# Altium PCB PCB_emuladorHIL_2025-01-22.pcbdoc
Units mm, origin at the board's own origin, x right, y up, seen from the top; angles counter-clockwise.
Board outline 88.01 x 83.31 mm, 2 copper layers (Top Layer, Bottom Layer); 9 components, 62 nets, 83 pads, 0 vias.
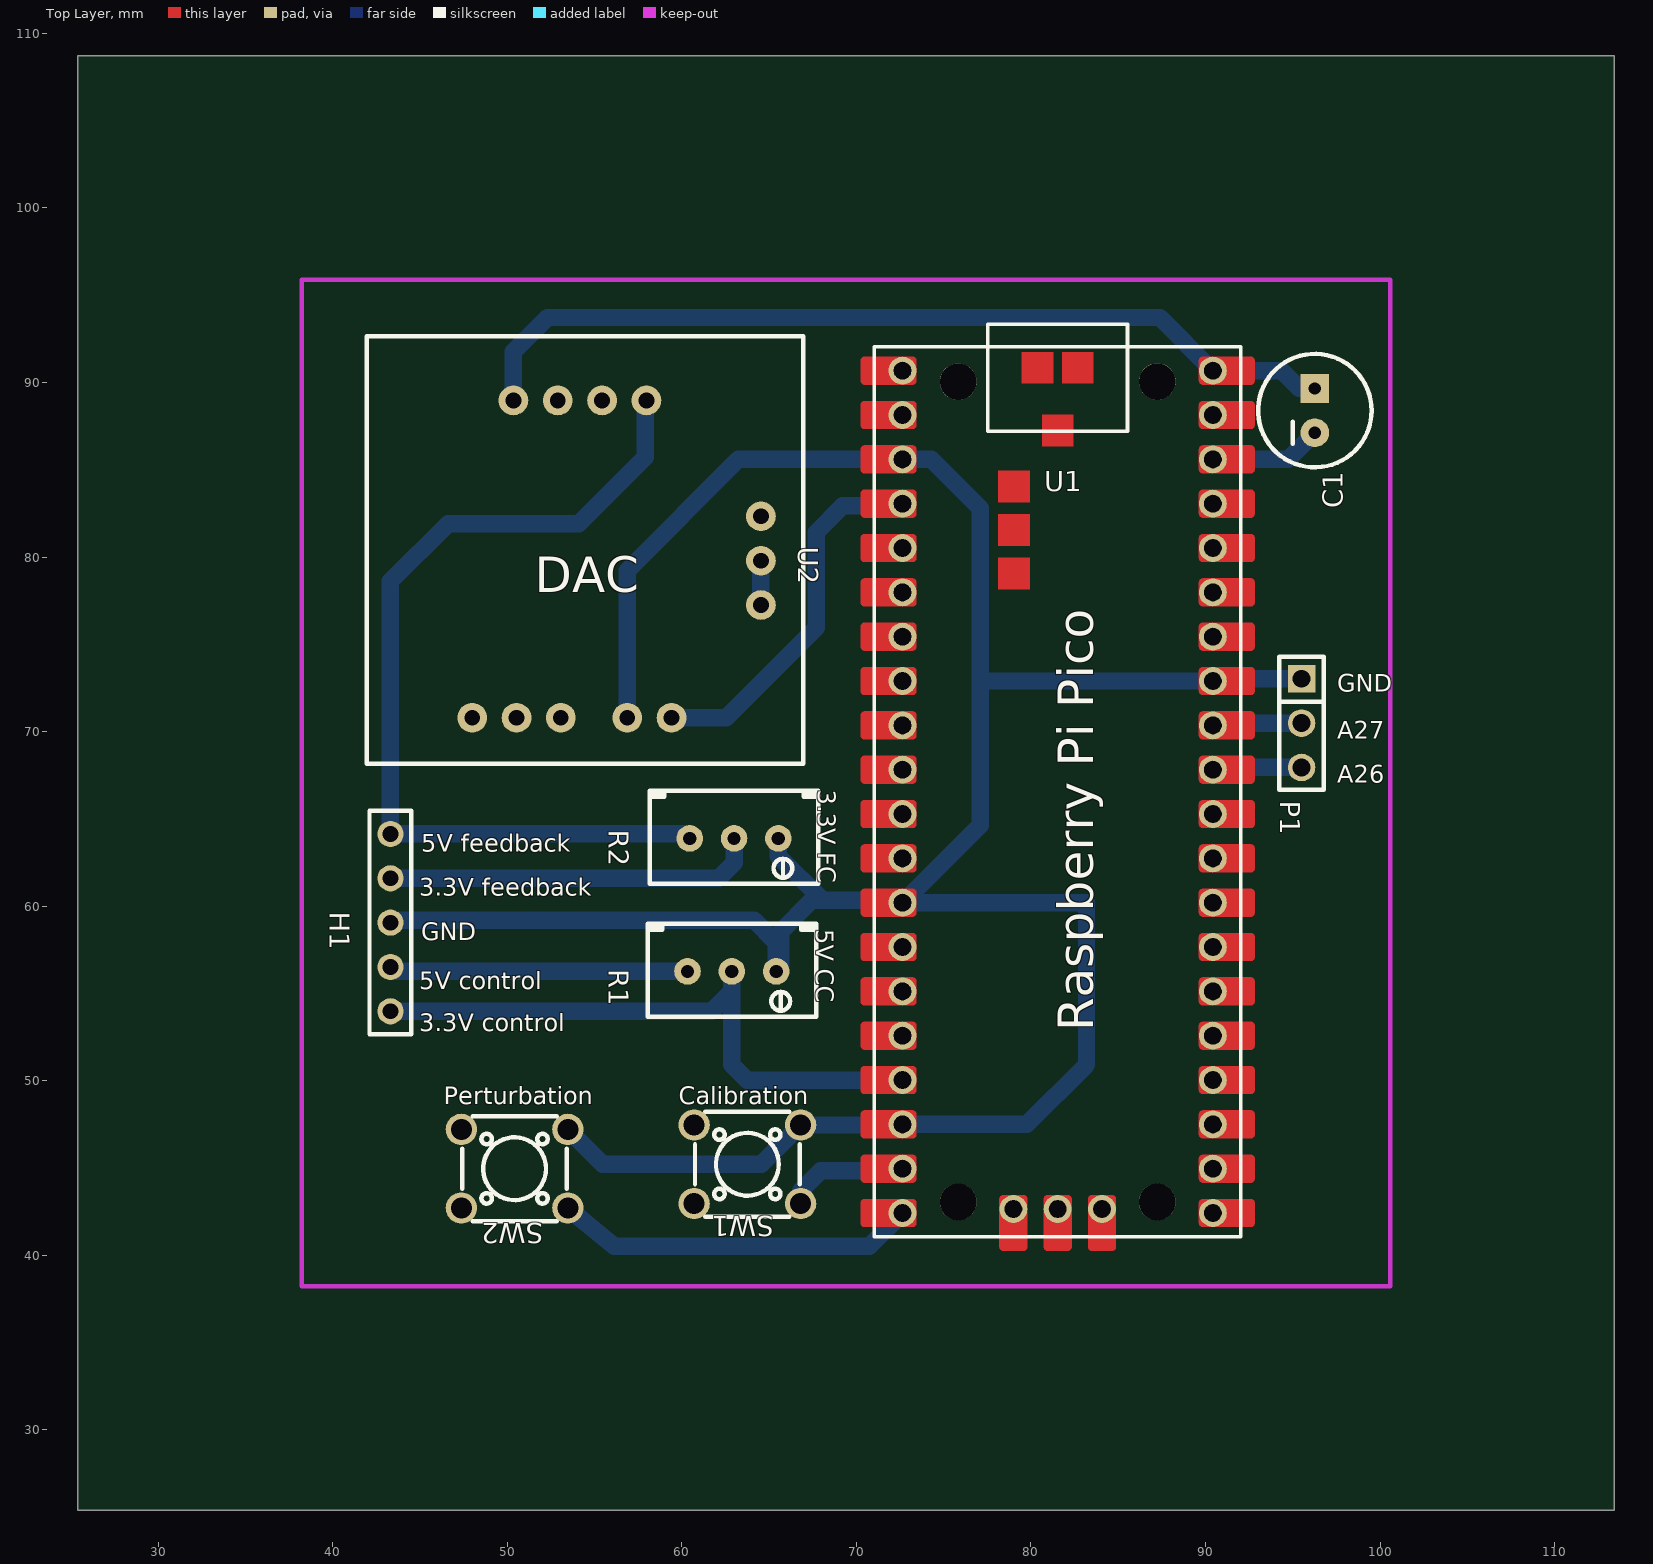
[diagram p0: Top Layer view]
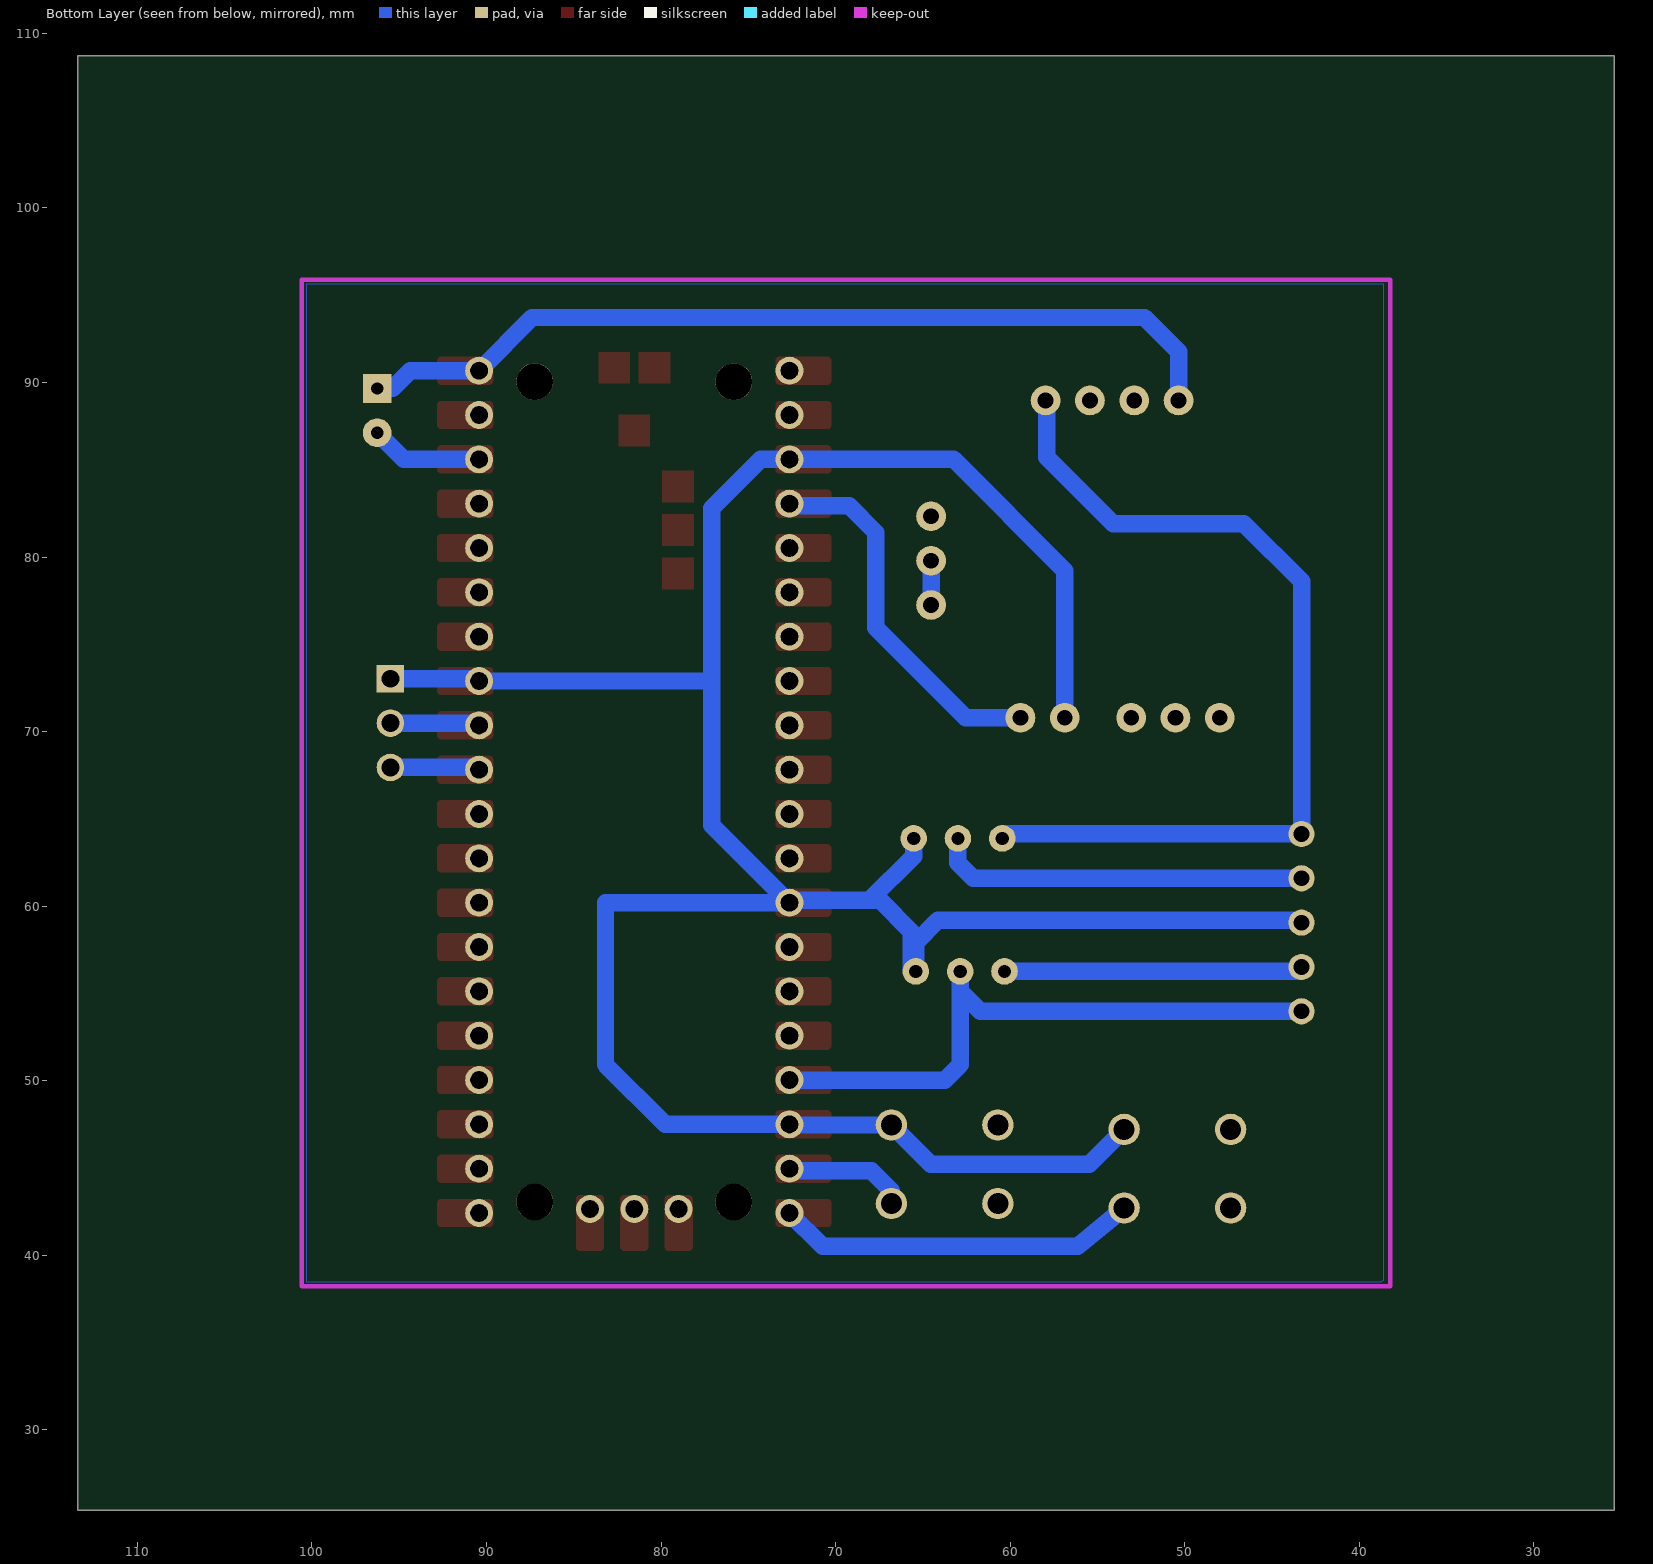
[diagram p1: Bottom Layer view, seen from below]

## Layer stack, top to bottom
Top Layer: signal copper (thickness not stored)
Dielectric: dielectric 0.32, FR-4, Dk 4.8
Bottom Layer: signal copper (thickness not stored)

## Board outline
113.411,25.4 25.4,25.4 25.4,108.712 113.411,108.712

## Components (designator, comment, footprint, x,y, rotation, side; value= is the part's Value field where it differs from the comment)
C1 "SPARKFUN-CAPACITORS_CAP_POLPTH1" SPARKFUN-CAPACITORS_CPOL-RADIAL-100UF-25V 96.266,88.392 r90 top
H1 "5-146278-5" HDR-TH_5P-P2.54-V-M_77311-101-05LF 43.307,59.055 r270 top
P1 "Header-Female-2.54_1x3" HDR-TH_3P-P2.54-V-F 95.504,70.485 r270 top
R1 "50Ω" RES-ADJ-TH_3296W 62.865,56.261 r270 top
R2 "50Ω" RES-ADJ-TH_3296W 62.992,63.881 r270 top
SW1 "Button-6x6x6mm" SW-TH_4P-L6.0-W6.0-P4.50-LS6.1 63.754,45.212 r180 top
SW2 "Button-6x6x6mm" SW-TH_4P-L6.0-W6.0-P4.50-LS6.1 50.419,44.958 r180 top
U1 "RASPBERRY-PI-PICO-FULL COPY" RASPBERRY-PI-PICO-FULL-ROMAN 81.534,66.548 r0 top
U2 "DAC GP8101 Based" "DAC GP8101" 56.261,79.883 r270 top

## Footprints (in the part's own frame and the unit in brackets; to place one, negate y for a bottom-side part, rotate by r counter-clockwise, add the part's x,y. Pads: shape width x height; smd on the part's side, far side on the other; paste and mask are expansions set on the pad)
"DAC GP8101" [mm]
  round 1.7 hole 0.9 paste+0 mask+0.051: 1(-9.09,-5.91) 2(-9.09,-3.37) 3(-9.09,-0.83) 4(-9.09,1.71) 5(9.09,3.15) 6(9.09,0.61) 7(9.09,-8.27) 8(9.09,-5.73) 9(9.09,-3.19) 10(-2.45,8.27) 11(0.09,8.27) 12(2.63,8.27)
  silkscreen extent -12.78,-14.31 11.72,10.69
HDR-TH_3P-P2.54-V-F [mil]
  rect 62x62 hole 40.16 paste+0 mask+2: 1(-100,0)
  round 62 hole 40.16 paste+0 mask+2: 2(0,0) 3(100,0)
  silkscreen extent -150,-50 150,50
HDR-TH_5P-P2.54-V-M_77311-101-05LF [mm]
  round 1.5 hole 0.9 paste+0 mask+0.051: 1(-5.08,0) 2(-2.54,0) 3(0,0) 4(2.54,0) 5(5.08,0)
  silkscreen extent -6.4,-1.2 6.4,1.2
RASPBERRY-PI-PICO-FULL-ROMAN [mil]
  round 62.99 hole 39.36 paste+0 mask+2.01: 1(-350,950) 2(-350,850) 3(-350,750) 4(-350,650) 5(-350,550) 6(-350,450) 7(-350,350) 8(-350,250) 9(-350,150) 10(-350,50) 11(-350,-50) 12(-350,-150) 13(-350,-250) 14(-350,-350) 15(-350,-450) 16(-350,-550) 17(-350,-650) 18(-350,-750) 19(-350,-850) 20(-350,-950) 21(350,-950) 22(350,-850) 23(350,-750) 24(350,-650) 25(350,-550) 26(350,-450) 27(350,-350) 28(350,-250) 29(350,-150) 30(350,-50) 31(350,50) 32(350,150) 33(350,250) 34(350,350) 35(350,450) 36(350,550) 37(350,650) 38(350,750) 39(350,850) 40(350,950) 41(100,-940.94)
  round 62.99 hole 39.36 paste+0 mask+2: 42(0,-940.94) 43(-100,-940.94)
  round 82.68 hole 82.68 unplated paste+0: ""(-224.5,925) ""(-224.41,-925.19) ""(224.42,-925.19) ""(224.5,925.25)
  Top Layer region: -444.49,972.05 -444.42,973.18 -444.21,974.31 -443.87,975.4 -443.4,976.44 -442.81,977.41 -442.11,978.31 -441.3,979.12 -440.41,979.82 -439.43,980.41 -438.39,980.88 -437.3,981.22 -436.18,981.43 -435.04,981.49 -327.95,981.49 -326.81,981.43 -325.69,981.22 -324.6,980.88 -323.56,980.41 -322.58,979.82 -321.69,979.12 -320.88,978.31 -320.18,977.41 -319.59,976.44 -319.12,975.4 -318.78,974.31 -318.57,973.18 -318.5,972.05 -318.5,927.95 -318.57,926.81 -318.78,925.69 -319.12,924.6 -319.59,923.56 -320.18,922.58 -320.88,921.69 -321.69,920.88 -322.58,920.17 -323.56,919.58 -324.6,919.12 -325.69,918.78 -326.81,918.57 -327.95,918.5 -435.04,918.5 -436.18,918.57 -437.3,918.78 -438.39,919.12 -439.43,919.58 -440.41,920.17 -441.3,920.88 -442.11,921.69 -442.81,922.58 -443.4,923.56 -443.87,924.6 -444.21,925.69 -444.42,926.81 -444.49,927.95
  Top Layer region: -444.49,872.05 -444.42,873.18 -444.21,874.31 -443.87,875.4 -443.4,876.44 -442.81,877.41 -442.11,878.31 -441.3,879.12 -440.41,879.82 -439.43,880.41 -438.39,880.88 -437.3,881.22 -436.18,881.43 -435.04,881.49 -327.95,881.49 -326.81,881.43 -325.69,881.22 -324.6,880.88 -323.56,880.41 -322.58,879.82 -321.69,879.12 -320.88,878.31 -320.18,877.41 -319.59,876.44 -319.12,875.4 -318.78,874.31 -318.57,873.18 -318.5,872.05 -318.5,827.95 -318.57,826.81 -318.78,825.69 -319.12,824.6 -319.59,823.56 -320.18,822.58 -320.88,821.69 -321.69,820.88 -322.58,820.17 -323.56,819.58 -324.6,819.12 -325.69,818.78 -326.81,818.57 -327.95,818.5 -435.04,818.5 -436.18,818.57 -437.3,818.78 -438.39,819.12 -439.43,819.58 -440.41,820.17 -441.3,820.88 -442.11,821.69 -442.81,822.58 -443.4,823.56 -443.87,824.6 -444.21,825.69 -444.42,826.81 -444.49,827.95
  Top Layer region: -444.49,772.05 -444.42,773.18 -444.21,774.31 -443.87,775.4 -443.4,776.44 -442.81,777.41 -442.11,778.31 -441.3,779.12 -440.41,779.82 -439.43,780.41 -438.39,780.88 -437.3,781.22 -436.18,781.43 -435.04,781.49 -327.95,781.49 -326.81,781.43 -325.69,781.22 -324.6,780.88 -323.56,780.41 -322.58,779.82 -321.69,779.12 -320.88,778.31 -320.18,777.41 -319.59,776.44 -319.12,775.4 -318.78,774.31 -318.57,773.18 -318.5,772.05 -318.5,727.95 -318.57,726.81 -318.78,725.69 -319.12,724.6 -319.59,723.56 -320.18,722.58 -320.88,721.69 -321.69,720.88 -322.58,720.18 -323.56,719.58 -324.6,719.12 -325.69,718.78 -326.81,718.57 -327.95,718.5 -435.04,718.5 -436.18,718.57 -437.3,718.78 -438.39,719.12 -439.43,719.58 -440.41,720.18 -441.3,720.88 -442.11,721.69 -442.81,722.58 -443.4,723.56 -443.87,724.6 -444.21,725.69 -444.42,726.81 -444.49,727.95
  Top Layer region: -444.49,672.05 -444.42,673.18 -444.21,674.31 -443.87,675.4 -443.4,676.44 -442.81,677.41 -442.11,678.31 -441.3,679.12 -440.41,679.82 -439.43,680.41 -438.39,680.88 -437.3,681.22 -436.18,681.43 -435.04,681.49 -327.95,681.49 -326.81,681.43 -325.69,681.22 -324.6,680.88 -323.56,680.41 -322.58,679.82 -321.69,679.12 -320.88,678.31 -320.18,677.41 -319.59,676.44 -319.12,675.4 -318.78,674.31 -318.57,673.18 -318.5,672.05 -318.5,627.95 -318.57,626.81 -318.78,625.69 -319.12,624.6 -319.59,623.56 -320.18,622.58 -320.88,621.69 -321.69,620.88 -322.58,620.18 -323.56,619.59 -324.6,619.12 -325.69,618.78 -326.81,618.57 -327.95,618.5 -435.04,618.5 -436.18,618.57 -437.3,618.78 -438.39,619.12 -439.43,619.59 -440.41,620.18 -441.3,620.88 -442.11,621.69 -442.81,622.58 -443.4,623.56 -443.87,624.6 -444.21,625.69 -444.42,626.81 -444.49,627.95
  Top Layer region: -444.49,572.05 -444.42,573.19 -444.21,574.31 -443.87,575.4 -443.4,576.44 -442.81,577.41 -442.11,578.31 -441.3,579.12 -440.41,579.82 -439.43,580.41 -438.39,580.88 -437.3,581.22 -436.18,581.43 -435.04,581.49 -327.95,581.49 -326.81,581.43 -325.69,581.22 -324.6,580.88 -323.56,580.41 -322.58,579.82 -321.69,579.12 -320.88,578.31 -320.18,577.41 -319.59,576.44 -319.12,575.4 -318.78,574.31 -318.57,573.19 -318.5,572.05 -318.5,527.95 -318.57,526.81 -318.78,525.69 -319.12,524.6 -319.59,523.56 -320.18,522.58 -320.88,521.69 -321.69,520.88 -322.58,520.18 -323.56,519.59 -324.6,519.12 -325.69,518.78 -326.81,518.57 -327.95,518.5 -435.04,518.5 -436.18,518.57 -437.3,518.78 -438.39,519.12 -439.43,519.59 -440.41,520.18 -441.3,520.88 -442.11,521.69 -442.81,522.58 -443.4,523.56 -443.87,524.6 -444.21,525.69 -444.42,526.81 -444.49,527.95
  Top Layer region: -444.49,472.05 -444.42,473.19 -444.21,474.31 -443.87,475.4 -443.4,476.44 -442.81,477.41 -442.11,478.31 -441.3,479.12 -440.41,479.82 -439.43,480.41 -438.39,480.88 -437.3,481.22 -436.18,481.43 -435.04,481.5 -327.95,481.5 -326.81,481.43 -325.69,481.22 -324.6,480.88 -323.56,480.41 -322.58,479.82 -321.69,479.12 -320.88,478.31 -320.18,477.41 -319.59,476.44 -319.12,475.4 -318.78,474.31 -318.57,473.19 -318.5,472.05 -318.5,427.95 -318.57,426.81 -318.78,425.69 -319.12,424.6 -319.59,423.56 -320.18,422.58 -320.88,421.69 -321.69,420.88 -322.58,420.18 -323.56,419.59 -324.6,419.12 -325.69,418.78 -326.81,418.57 -327.95,418.5 -435.04,418.5 -436.18,418.57 -437.3,418.78 -438.39,419.12 -439.43,419.59 -440.41,420.18 -441.3,420.88 -442.11,421.69 -442.81,422.58 -443.4,423.56 -443.87,424.6 -444.21,425.69 -444.42,426.81 -444.49,427.95
  Top Layer region: -444.49,372.05 -444.42,373.19 -444.21,374.31 -443.87,375.4 -443.4,376.44 -442.81,377.41 -442.11,378.31 -441.3,379.12 -440.41,379.82 -439.43,380.41 -438.39,380.88 -437.3,381.22 -436.18,381.43 -435.04,381.5 -327.95,381.5 -326.81,381.43 -325.69,381.22 -324.6,380.88 -323.56,380.41 -322.58,379.82 -321.69,379.12 -320.88,378.31 -320.18,377.41 -319.59,376.44 -319.12,375.4 -318.78,374.31 -318.57,373.19 -318.5,372.05 -318.5,327.95 -318.57,326.81 -318.78,325.69 -319.12,324.6 -319.59,323.56 -320.18,322.58 -320.88,321.69 -321.69,320.88 -322.58,320.18 -323.56,319.59 -324.6,319.12 -325.69,318.78 -326.81,318.57 -327.95,318.5 -435.04,318.5 -436.18,318.57 -437.3,318.78 -438.39,319.12 -439.43,319.59 -440.41,320.18 -441.3,320.88 -442.11,321.69 -442.81,322.58 -443.4,323.56 -443.87,324.6 -444.21,325.69 -444.42,326.81 -444.49,327.95
  Top Layer region: -444.49,272.05 -444.42,273.19 -444.21,274.31 -443.87,275.4 -443.4,276.44 -442.81,277.41 -442.11,278.31 -441.3,279.12 -440.41,279.82 -439.43,280.41 -438.39,280.88 -437.3,281.22 -436.18,281.43 -435.04,281.5 -327.95,281.5 -326.81,281.43 -325.69,281.22 -324.6,280.88 -323.56,280.41 -322.58,279.82 -321.69,279.12 -320.88,278.31 -320.18,277.41 -319.59,276.44 -319.12,275.4 -318.78,274.31 -318.57,273.19 -318.5,272.05 -318.5,227.95 -318.57,226.81 -318.78,225.69 -319.12,224.6 -319.59,223.56 -320.18,222.58 -320.88,221.69 -321.69,220.88 -322.58,220.18 -323.56,219.59 -324.6,219.12 -325.69,218.78 -326.81,218.57 -327.95,218.5 -435.04,218.5 -436.18,218.57 -437.3,218.78 -438.39,219.12 -439.43,219.59 -440.41,220.18 -441.3,220.88 -442.11,221.69 -442.81,222.58 -443.4,223.56 -443.87,224.6 -444.21,225.69 -444.42,226.81 -444.49,227.95
  Top Layer region: -444.49,172.05 -444.42,173.19 -444.21,174.31 -443.87,175.4 -443.4,176.44 -442.81,177.41 -442.11,178.31 -441.3,179.12 -440.41,179.82 -439.43,180.41 -438.39,180.88 -437.3,181.22 -436.18,181.43 -435.04,181.5 -327.95,181.5 -326.81,181.43 -325.69,181.22 -324.6,180.88 -323.56,180.41 -322.58,179.82 -321.69,179.12 -320.88,178.31 -320.18,177.41 -319.59,176.44 -319.12,175.4 -318.78,174.31 -318.57,173.19 -318.5,172.05 -318.5,127.95 -318.57,126.81 -318.78,125.69 -319.12,124.6 -319.59,123.56 -320.18,122.58 -320.88,121.69 -321.69,120.88 -322.58,120.18 -323.56,119.59 -324.6,119.12 -325.69,118.78 -326.81,118.57 -327.95,118.5 -435.04,118.5 -436.18,118.57 -437.3,118.78 -438.39,119.12 -439.43,119.59 -440.41,120.18 -441.3,120.88 -442.11,121.69 -442.81,122.58 -443.4,123.56 -443.87,124.6 -444.21,125.69 -444.42,126.81 -444.49,127.95
  Top Layer region: -444.49,72.05 -444.42,73.19 -444.21,74.31 -443.87,75.4 -443.4,76.44 -442.81,77.41 -442.11,78.31 -441.3,79.12 -440.41,79.82 -439.43,80.41 -438.39,80.88 -437.3,81.22 -436.18,81.43 -435.04,81.5 -327.95,81.5 -326.81,81.43 -325.69,81.22 -324.6,80.88 -323.56,80.41 -322.58,79.82 -321.69,79.12 -320.88,78.31 -320.18,77.41 -319.59,76.44 -319.12,75.4 -318.78,74.31 -318.57,73.19 -318.5,72.05 -318.5,27.95 -318.57,26.81 -318.78,25.69 -319.12,24.6 -319.59,23.56 -320.18,22.59 -320.88,21.69 -321.69,20.88 -322.58,20.18 -323.56,19.59 -324.6,19.12 -325.69,18.78 -326.81,18.57 -327.95,18.5 -435.04,18.5 -436.18,18.57 -437.3,18.78 -438.39,19.12 -439.43,19.59 -440.41,20.18 -441.3,20.88 -442.11,21.69 -442.81,22.59 -443.4,23.56 -443.87,24.6 -444.21,25.69 -444.42,26.81 -444.49,27.95
  Top Layer region: -444.49,-27.95 -444.42,-26.81 -444.21,-25.69 -443.87,-24.6 -443.4,-23.56 -442.81,-22.59 -442.11,-21.69 -441.3,-20.88 -440.41,-20.18 -439.43,-19.59 -438.39,-19.12 -437.3,-18.78 -436.18,-18.57 -435.04,-18.5 -327.95,-18.5 -326.81,-18.57 -325.69,-18.78 -324.6,-19.12 -323.56,-19.59 -322.58,-20.18 -321.69,-20.88 -320.88,-21.69 -320.18,-22.59 -319.59,-23.56 -319.12,-24.6 -318.78,-25.69 -318.57,-26.81 -318.5,-27.95 -318.5,-72.05 -318.57,-73.19 -318.78,-74.31 -319.12,-75.4 -319.59,-76.44 -320.18,-77.41 -320.88,-78.31 -321.69,-79.12 -322.58,-79.82 -323.56,-80.41 -324.6,-80.88 -325.69,-81.22 -326.81,-81.43 -327.95,-81.5 -435.04,-81.5 -436.18,-81.43 -437.3,-81.22 -438.39,-80.88 -439.43,-80.41 -440.41,-79.82 -441.3,-79.12 -442.11,-78.31 -442.81,-77.41 -443.4,-76.44 -443.87,-75.4 -444.21,-74.31 -444.42,-73.19 -444.49,-72.05
  Top Layer region: -444.49,-127.95 -444.42,-126.81 -444.21,-125.69 -443.87,-124.6 -443.4,-123.56 -442.81,-122.58 -442.11,-121.69 -441.3,-120.88 -440.41,-120.18 -439.43,-119.59 -438.39,-119.12 -437.3,-118.78 -436.18,-118.57 -435.04,-118.5 -327.95,-118.5 -326.81,-118.57 -325.69,-118.78 -324.6,-119.12 -323.56,-119.59 -322.58,-120.18 -321.69,-120.88 -320.88,-121.69 -320.18,-122.58 -319.59,-123.56 -319.12,-124.6 -318.78,-125.69 -318.57,-126.81 -318.5,-127.95 -318.5,-172.05 -318.57,-173.19 -318.78,-174.31 -319.12,-175.4 -319.59,-176.44 -320.18,-177.41 -320.88,-178.31 -321.69,-179.12 -322.58,-179.82 -323.56,-180.41 -324.6,-180.88 -325.69,-181.22 -326.81,-181.43 -327.95,-181.5 -435.04,-181.5 -436.18,-181.43 -437.3,-181.22 -438.39,-180.88 -439.43,-180.41 -440.41,-179.82 -441.3,-179.12 -442.11,-178.31 -442.81,-177.41 -443.4,-176.44 -443.87,-175.4 -444.21,-174.31 -444.42,-173.19 -444.49,-172.05
  Top Layer region: -444.49,-227.95 -444.42,-226.81 -444.21,-225.69 -443.87,-224.6 -443.4,-223.56 -442.81,-222.58 -442.11,-221.69 -441.3,-220.88 -440.41,-220.18 -439.43,-219.59 -438.39,-219.12 -437.3,-218.78 -436.18,-218.57 -435.04,-218.5 -327.95,-218.5 -326.81,-218.57 -325.69,-218.78 -324.6,-219.12 -323.56,-219.59 -322.58,-220.18 -321.69,-220.88 -320.88,-221.69 -320.18,-222.58 -319.59,-223.56 -319.12,-224.6 -318.78,-225.69 -318.57,-226.81 -318.5,-227.95 -318.5,-272.05 -318.57,-273.19 -318.78,-274.31 -319.12,-275.4 -319.59,-276.44 -320.18,-277.41 -320.88,-278.31 -321.69,-279.12 -322.58,-279.82 -323.56,-280.41 -324.6,-280.88 -325.69,-281.22 -326.81,-281.43 -327.95,-281.5 -435.04,-281.5 -436.18,-281.43 -437.3,-281.22 -438.39,-280.88 -439.43,-280.41 -440.41,-279.82 -441.3,-279.12 -442.11,-278.31 -442.81,-277.41 -443.4,-276.44 -443.87,-275.4 -444.21,-274.31 -444.42,-273.19 -444.49,-272.05
  Top Layer region: -444.49,-327.95 -444.42,-326.81 -444.21,-325.69 -443.87,-324.6 -443.4,-323.56 -442.81,-322.58 -442.11,-321.69 -441.3,-320.88 -440.41,-320.18 -439.43,-319.59 -438.39,-319.12 -437.3,-318.78 -436.18,-318.57 -435.04,-318.5 -327.95,-318.5 -326.81,-318.57 -325.69,-318.78 -324.6,-319.12 -323.56,-319.59 -322.58,-320.18 -321.69,-320.88 -320.88,-321.69 -320.18,-322.58 -319.59,-323.56 -319.12,-324.6 -318.78,-325.69 -318.57,-326.81 -318.5,-327.95 -318.5,-372.05 -318.57,-373.19 -318.78,-374.31 -319.12,-375.4 -319.59,-376.44 -320.18,-377.41 -320.88,-378.31 -321.69,-379.12 -322.58,-379.82 -323.56,-380.41 -324.6,-380.88 -325.69,-381.22 -326.81,-381.43 -327.95,-381.5 -435.04,-381.5 -436.18,-381.43 -437.3,-381.22 -438.39,-380.88 -439.43,-380.41 -440.41,-379.82 -441.3,-379.12 -442.11,-378.31 -442.81,-377.41 -443.4,-376.44 -443.87,-375.4 -444.21,-374.31 -444.42,-373.19 -444.49,-372.05
  Top Layer region: -444.49,-427.95 -444.42,-426.81 -444.21,-425.69 -443.87,-424.6 -443.4,-423.56 -442.81,-422.58 -442.11,-421.69 -441.3,-420.88 -440.41,-420.18 -439.43,-419.59 -438.39,-419.12 -437.3,-418.78 -436.18,-418.57 -435.04,-418.5 -327.95,-418.5 -326.81,-418.57 -325.69,-418.78 -324.6,-419.12 -323.56,-419.59 -322.58,-420.18 -321.69,-420.88 -320.88,-421.69 -320.18,-422.58 -319.59,-423.56 -319.12,-424.6 -318.78,-425.69 -318.57,-426.81 -318.5,-427.95 -318.5,-472.05 -318.57,-473.19 -318.78,-474.31 -319.12,-475.4 -319.59,-476.44 -320.18,-477.41 -320.88,-478.31 -321.69,-479.12 -322.58,-479.82 -323.56,-480.41 -324.6,-480.88 -325.69,-481.22 -326.81,-481.43 -327.95,-481.5 -435.04,-481.5 -436.18,-481.43 -437.3,-481.22 -438.39,-480.88 -439.43,-480.41 -440.41,-479.82 -441.3,-479.12 -442.11,-478.31 -442.81,-477.41 -443.4,-476.44 -443.87,-475.4 -444.21,-474.31 -444.42,-473.19 -444.49,-472.05
  Top Layer region: -444.49,-527.95 -444.42,-526.81 -444.21,-525.69 -443.87,-524.6 -443.4,-523.56 -442.81,-522.58 -442.11,-521.69 -441.3,-520.88 -440.41,-520.18 -439.43,-519.59 -438.39,-519.12 -437.3,-518.78 -436.18,-518.57 -435.04,-518.5 -327.95,-518.5 -326.81,-518.57 -325.69,-518.78 -324.6,-519.12 -323.56,-519.59 -322.58,-520.18 -321.69,-520.88 -320.88,-521.69 -320.18,-522.58 -319.59,-523.56 -319.12,-524.6 -318.78,-525.69 -318.57,-526.81 -318.5,-527.95 -318.5,-572.05 -318.57,-573.19 -318.78,-574.31 -319.12,-575.4 -319.59,-576.44 -320.18,-577.41 -320.88,-578.31 -321.69,-579.12 -322.58,-579.82 -323.56,-580.41 -324.6,-580.88 -325.69,-581.22 -326.81,-581.43 -327.95,-581.49 -435.04,-581.49 -436.18,-581.43 -437.3,-581.22 -438.39,-580.88 -439.43,-580.41 -440.41,-579.82 -441.3,-579.12 -442.11,-578.31 -442.81,-577.41 -443.4,-576.44 -443.87,-575.4 -444.21,-574.31 -444.42,-573.19 -444.49,-572.05
  Top Layer region: -444.49,-627.95 -444.42,-626.81 -444.21,-625.69 -443.87,-624.6 -443.4,-623.56 -442.81,-622.58 -442.11,-621.69 -441.3,-620.88 -440.41,-620.18 -439.43,-619.59 -438.39,-619.12 -437.3,-618.78 -436.18,-618.57 -435.04,-618.5 -327.95,-618.5 -326.81,-618.57 -325.69,-618.78 -324.6,-619.12 -323.56,-619.59 -322.58,-620.18 -321.69,-620.88 -320.88,-621.69 -320.18,-622.58 -319.59,-623.56 -319.12,-624.6 -318.78,-625.69 -318.57,-626.81 -318.5,-627.95 -318.5,-672.05 -318.57,-673.18 -318.78,-674.31 -319.12,-675.4 -319.59,-676.44 -320.18,-677.41 -320.88,-678.31 -321.69,-679.12 -322.58,-679.82 -323.56,-680.41 -324.6,-680.88 -325.69,-681.22 -326.81,-681.43 -327.95,-681.49 -435.04,-681.49 -436.18,-681.43 -437.3,-681.22 -438.39,-680.88 -439.43,-680.41 -440.41,-679.82 -441.3,-679.12 -442.11,-678.31 -442.81,-677.41 -443.4,-676.44 -443.87,-675.4 -444.21,-674.31 -444.42,-673.18 -444.49,-672.05
  Top Layer region: -444.49,-727.95 -444.42,-726.81 -444.21,-725.69 -443.87,-724.6 -443.4,-723.56 -442.81,-722.58 -442.11,-721.69 -441.3,-720.88 -440.41,-720.18 -439.43,-719.58 -438.39,-719.12 -437.3,-718.78 -436.18,-718.57 -435.04,-718.5 -327.95,-718.5 -326.81,-718.57 -325.69,-718.78 -324.6,-719.12 -323.56,-719.58 -322.58,-720.18 -321.69,-720.88 -320.88,-721.69 -320.18,-722.58 -319.59,-723.56 -319.12,-724.6 -318.78,-725.69 -318.57,-726.81 -318.5,-727.95 -318.5,-772.05 -318.57,-773.18 -318.78,-774.31 -319.12,-775.4 -319.59,-776.44 -320.18,-777.41 -320.88,-778.31 -321.69,-779.12 -322.58,-779.82 -323.56,-780.41 -324.6,-780.88 -325.69,-781.22 -326.81,-781.43 -327.95,-781.49 -435.04,-781.49 -436.18,-781.43 -437.3,-781.22 -438.39,-780.88 -439.43,-780.41 -440.41,-779.82 -441.3,-779.12 -442.11,-778.31 -442.81,-777.41 -443.4,-776.44 -443.87,-775.4 -444.21,-774.31 -444.42,-773.18 -444.49,-772.05
  Top Layer region: -444.49,-827.95 -444.42,-826.81 -444.21,-825.69 -443.87,-824.6 -443.4,-823.56 -442.81,-822.58 -442.11,-821.69 -441.3,-820.88 -440.41,-820.17 -439.43,-819.58 -438.39,-819.12 -437.3,-818.78 -436.18,-818.57 -435.04,-818.5 -327.95,-818.5 -326.81,-818.57 -325.69,-818.78 -324.6,-819.12 -323.56,-819.58 -322.58,-820.17 -321.69,-820.88 -320.88,-821.69 -320.18,-822.58 -319.59,-823.56 -319.12,-824.6 -318.78,-825.69 -318.57,-826.81 -318.5,-827.95 -318.5,-872.05 -318.57,-873.18 -318.78,-874.31 -319.12,-875.4 -319.59,-876.44 -320.18,-877.41 -320.88,-878.31 -321.69,-879.12 -322.58,-879.82 -323.56,-880.41 -324.6,-880.88 -325.69,-881.22 -326.81,-881.43 -327.95,-881.49 -435.04,-881.49 -436.18,-881.43 -437.3,-881.22 -438.39,-880.88 -439.43,-880.41 -440.41,-879.82 -441.3,-879.12 -442.11,-878.31 -442.81,-877.41 -443.4,-876.44 -443.87,-875.4 -444.21,-874.31 -444.42,-873.18 -444.49,-872.05
  Top Layer region: -444.49,-927.95 -444.42,-926.81 -444.21,-925.69 -443.87,-924.6 -443.4,-923.56 -442.81,-922.58 -442.11,-921.69 -441.3,-920.88 -440.41,-920.17 -439.43,-919.58 -438.39,-919.12 -437.3,-918.78 -436.18,-918.57 -435.04,-918.5 -327.95,-918.5 -326.81,-918.57 -325.69,-918.78 -324.6,-919.12 -323.56,-919.58 -322.58,-920.17 -321.69,-920.88 -320.88,-921.69 -320.18,-922.58 -319.59,-923.56 -319.12,-924.6 -318.78,-925.69 -318.57,-926.81 -318.5,-927.95 -318.5,-972.05 -318.57,-973.18 -318.78,-974.31 -319.12,-975.4 -319.59,-976.44 -320.18,-977.41 -320.88,-978.31 -321.69,-979.12 -322.58,-979.82 -323.56,-980.41 -324.6,-980.88 -325.69,-981.22 -326.81,-981.43 -327.95,-981.49 -435.04,-981.49 -436.18,-981.43 -437.3,-981.22 -438.39,-980.88 -439.43,-980.41 -440.41,-979.82 -441.3,-979.12 -442.11,-978.31 -442.81,-977.41 -443.4,-976.44 -443.87,-975.4 -444.21,-974.31 -444.42,-973.18 -444.49,-972.05
  Top Layer region: 318.5,-927.95 318.57,-926.81 318.78,-925.69 319.12,-924.6 319.59,-923.56 320.18,-922.58 320.88,-921.69 321.69,-920.88 322.58,-920.17 323.56,-919.58 324.6,-919.12 325.69,-918.78 326.81,-918.57 327.95,-918.5 435.04,-918.5 436.18,-918.57 437.3,-918.78 438.39,-919.12 439.43,-919.58 440.41,-920.17 441.3,-920.88 442.11,-921.69 442.81,-922.58 443.4,-923.56 443.87,-924.6 444.21,-925.69 444.42,-926.81 444.49,-927.95 444.49,-972.05 444.42,-973.18 444.21,-974.31 443.87,-975.4 443.4,-976.44 442.81,-977.41 442.11,-978.31 441.3,-979.12 440.41,-979.82 439.43,-980.41 438.39,-980.88 437.3,-981.22 436.18,-981.43 435.04,-981.49 327.95,-981.49 326.81,-981.43 325.69,-981.22 324.6,-980.88 323.56,-980.41 322.58,-979.82 321.69,-979.12 320.88,-978.31 320.18,-977.41 319.59,-976.44 319.12,-975.4 318.78,-974.31 318.57,-973.18 318.5,-972.05
  Top Layer region: 318.5,-827.95 318.57,-826.81 318.78,-825.69 319.12,-824.6 319.59,-823.56 320.18,-822.58 320.88,-821.69 321.69,-820.88 322.58,-820.17 323.56,-819.58 324.6,-819.12 325.69,-818.78 326.81,-818.57 327.95,-818.5 435.04,-818.5 436.18,-818.57 437.3,-818.78 438.39,-819.12 439.43,-819.58 440.41,-820.17 441.3,-820.88 442.11,-821.69 442.81,-822.58 443.4,-823.56 443.87,-824.6 444.21,-825.69 444.42,-826.81 444.49,-827.95 444.49,-872.05 444.42,-873.18 444.21,-874.31 443.87,-875.4 443.4,-876.44 442.81,-877.41 442.11,-878.31 441.3,-879.12 440.41,-879.82 439.43,-880.41 438.39,-880.88 437.3,-881.22 436.18,-881.43 435.04,-881.49 327.95,-881.49 326.81,-881.43 325.69,-881.22 324.6,-880.88 323.56,-880.41 322.58,-879.82 321.69,-879.12 320.88,-878.31 320.18,-877.41 319.59,-876.44 319.12,-875.4 318.78,-874.31 318.57,-873.18 318.5,-872.05
  Top Layer region: 318.5,-727.95 318.57,-726.81 318.78,-725.69 319.12,-724.6 319.59,-723.56 320.18,-722.58 320.88,-721.69 321.69,-720.88 322.58,-720.18 323.56,-719.58 324.6,-719.12 325.69,-718.78 326.81,-718.57 327.95,-718.5 435.04,-718.5 436.18,-718.57 437.3,-718.78 438.39,-719.12 439.43,-719.58 440.41,-720.18 441.3,-720.88 442.11,-721.69 442.81,-722.58 443.4,-723.56 443.87,-724.6 444.21,-725.69 444.42,-726.81 444.49,-727.95 444.49,-772.05 444.42,-773.18 444.21,-774.31 443.87,-775.4 443.4,-776.44 442.81,-777.41 442.11,-778.31 441.3,-779.12 440.41,-779.82 439.43,-780.41 438.39,-780.88 437.3,-781.22 436.18,-781.43 435.04,-781.49 327.95,-781.49 326.81,-781.43 325.69,-781.22 324.6,-780.88 323.56,-780.41 322.58,-779.82 321.69,-779.12 320.88,-778.31 320.18,-777.41 319.59,-776.44 319.12,-775.4 318.78,-774.31 318.57,-773.18 318.5,-772.05
  Top Layer region: 318.5,-627.95 318.57,-626.81 318.78,-625.69 319.12,-624.6 319.59,-623.56 320.18,-622.58 320.88,-621.69 321.69,-620.88 322.58,-620.18 323.56,-619.59 324.6,-619.12 325.69,-618.78 326.81,-618.57 327.95,-618.5 435.04,-618.5 436.18,-618.57 437.3,-618.78 438.39,-619.12 439.43,-619.59 440.41,-620.18 441.3,-620.88 442.11,-621.69 442.81,-622.58 443.4,-623.56 443.87,-624.6 444.21,-625.69 444.42,-626.81 444.49,-627.95 444.49,-672.05 444.42,-673.18 444.21,-674.31 443.87,-675.4 443.4,-676.44 442.81,-677.41 442.11,-678.31 441.3,-679.12 440.41,-679.82 439.43,-680.41 438.39,-680.88 437.3,-681.22 436.18,-681.43 435.04,-681.49 327.95,-681.49 326.81,-681.43 325.69,-681.22 324.6,-680.88 323.56,-680.41 322.58,-679.82 321.69,-679.12 320.88,-678.31 320.18,-677.41 319.59,-676.44 319.12,-675.4 318.78,-674.31 318.57,-673.18 318.5,-672.05
  Top Layer region: 318.5,-527.95 318.57,-526.81 318.78,-525.69 319.12,-524.6 319.59,-523.56 320.18,-522.58 320.88,-521.69 321.69,-520.88 322.58,-520.18 323.56,-519.59 324.6,-519.12 325.69,-518.78 326.81,-518.57 327.95,-518.5 435.04,-518.5 436.18,-518.57 437.3,-518.78 438.39,-519.12 439.43,-519.59 440.41,-520.18 441.3,-520.88 442.11,-521.69 442.81,-522.58 443.4,-523.56 443.87,-524.6 444.21,-525.69 444.42,-526.81 444.49,-527.95 444.49,-572.05 444.42,-573.19 444.21,-574.31 443.87,-575.4 443.4,-576.44 442.81,-577.41 442.11,-578.31 441.3,-579.12 440.41,-579.82 439.43,-580.41 438.39,-580.88 437.3,-581.22 436.18,-581.43 435.04,-581.49 327.95,-581.49 326.81,-581.43 325.69,-581.22 324.6,-580.88 323.56,-580.41 322.58,-579.82 321.69,-579.12 320.88,-578.31 320.18,-577.41 319.59,-576.44 319.12,-575.4 318.78,-574.31 318.57,-573.19 318.5,-572.05
  Top Layer region: 318.5,-427.95 318.57,-426.81 318.78,-425.69 319.12,-424.6 319.59,-423.56 320.18,-422.58 320.88,-421.69 321.69,-420.88 322.58,-420.18 323.56,-419.59 324.6,-419.12 325.69,-418.78 326.81,-418.57 327.95,-418.5 435.04,-418.5 436.18,-418.57 437.3,-418.78 438.39,-419.12 439.43,-419.59 440.41,-420.18 441.3,-420.88 442.11,-421.69 442.81,-422.58 443.4,-423.56 443.87,-424.6 444.21,-425.69 444.42,-426.81 444.49,-427.95 444.49,-472.05 444.42,-473.19 444.21,-474.31 443.87,-475.4 443.4,-476.44 442.81,-477.41 442.11,-478.31 441.3,-479.12 440.41,-479.82 439.43,-480.41 438.39,-480.88 437.3,-481.22 436.18,-481.43 435.04,-481.5 327.95,-481.5 326.81,-481.43 325.69,-481.22 324.6,-480.88 323.56,-480.41 322.58,-479.82 321.69,-479.12 320.88,-478.31 320.18,-477.41 319.59,-476.44 319.12,-475.4 318.78,-474.31 318.57,-473.19 318.5,-472.05
  Top Layer region: 318.5,-327.95 318.57,-326.81 318.78,-325.69 319.12,-324.6 319.59,-323.56 320.18,-322.58 320.88,-321.69 321.69,-320.88 322.58,-320.18 323.56,-319.59 324.6,-319.12 325.69,-318.78 326.81,-318.57 327.95,-318.5 435.04,-318.5 436.18,-318.57 437.3,-318.78 438.39,-319.12 439.43,-319.59 440.41,-320.18 441.3,-320.88 442.11,-321.69 442.81,-322.58 443.4,-323.56 443.87,-324.6 444.21,-325.69 444.42,-326.81 444.49,-327.95 444.49,-372.05 444.42,-373.19 444.21,-374.31 443.87,-375.4 443.4,-376.44 442.81,-377.41 442.11,-378.31 441.3,-379.12 440.41,-379.82 439.43,-380.41 438.39,-380.88 437.3,-381.22 436.18,-381.43 435.04,-381.5 327.95,-381.5 326.81,-381.43 325.69,-381.22 324.6,-380.88 323.56,-380.41 322.58,-379.82 321.69,-379.12 320.88,-378.31 320.18,-377.41 319.59,-376.44 319.12,-375.4 318.78,-374.31 318.57,-373.19 318.5,-372.05
  Top Layer region: 318.5,-227.95 318.57,-226.81 318.78,-225.69 319.12,-224.6 319.59,-223.56 320.18,-222.58 320.88,-221.69 321.69,-220.88 322.58,-220.18 323.56,-219.59 324.6,-219.12 325.69,-218.78 326.81,-218.57 327.95,-218.5 435.04,-218.5 436.18,-218.57 437.3,-218.78 438.39,-219.12 439.43,-219.59 440.41,-220.18 441.3,-220.88 442.11,-221.69 442.81,-222.58 443.4,-223.56 443.87,-224.6 444.21,-225.69 444.42,-226.81 444.49,-227.95 444.49,-272.05 444.42,-273.19 444.21,-274.31 443.87,-275.4 443.4,-276.44 442.81,-277.41 442.11,-278.31 441.3,-279.12 440.41,-279.82 439.43,-280.41 438.39,-280.88 437.3,-281.22 436.18,-281.43 435.04,-281.5 327.95,-281.5 326.81,-281.43 325.69,-281.22 324.6,-280.88 323.56,-280.41 322.58,-279.82 321.69,-279.12 320.88,-278.31 320.18,-277.41 319.59,-276.44 319.12,-275.4 318.78,-274.31 318.57,-273.19 318.5,-272.05
  Top Layer region: 318.5,-127.95 318.57,-126.81 318.78,-125.69 319.12,-124.6 319.59,-123.56 320.18,-122.58 320.88,-121.69 321.69,-120.88 322.58,-120.18 323.56,-119.59 324.6,-119.12 325.69,-118.78 326.81,-118.57 327.95,-118.5 435.04,-118.5 436.18,-118.57 437.3,-118.78 438.39,-119.12 439.43,-119.59 440.41,-120.18 441.3,-120.88 442.11,-121.69 442.81,-122.58 443.4,-123.56 443.87,-124.6 444.21,-125.69 444.42,-126.81 444.49,-127.95 444.49,-172.05 444.42,-173.19 444.21,-174.31 443.87,-175.4 443.4,-176.44 442.81,-177.41 442.11,-178.31 441.3,-179.12 440.41,-179.82 439.43,-180.41 438.39,-180.88 437.3,-181.22 436.18,-181.43 435.04,-181.5 327.95,-181.5 326.81,-181.43 325.69,-181.22 324.6,-180.88 323.56,-180.41 322.58,-179.82 321.69,-179.12 320.88,-178.31 320.18,-177.41 319.59,-176.44 319.12,-175.4 318.78,-174.31 318.57,-173.19 318.5,-172.05
  Top Layer region: 318.5,-27.95 318.57,-26.81 318.78,-25.69 319.12,-24.6 319.59,-23.56 320.18,-22.59 320.88,-21.69 321.69,-20.88 322.58,-20.18 323.56,-19.59 324.6,-19.12 325.69,-18.78 326.81,-18.57 327.95,-18.5 435.04,-18.5 436.18,-18.57 437.3,-18.78 438.39,-19.12 439.43,-19.59 440.41,-20.18 441.3,-20.88 442.11,-21.69 442.81,-22.59 443.4,-23.56 443.87,-24.6 444.21,-25.69 444.42,-26.81 444.49,-27.95 444.49,-72.05 444.42,-73.19 444.21,-74.31 443.87,-75.4 443.4,-76.44 442.81,-77.41 442.11,-78.31 441.3,-79.12 440.41,-79.82 439.43,-80.41 438.39,-80.88 437.3,-81.22 436.18,-81.43 435.04,-81.5 327.95,-81.5 326.81,-81.43 325.69,-81.22 324.6,-80.88 323.56,-80.41 322.58,-79.82 321.69,-79.12 320.88,-78.31 320.18,-77.41 319.59,-76.44 319.12,-75.4 318.78,-74.31 318.57,-73.19 318.5,-72.05
  Top Layer region: 318.5,72.05 318.57,73.19 318.78,74.31 319.12,75.4 319.59,76.44 320.18,77.41 320.88,78.31 321.69,79.12 322.58,79.82 323.56,80.41 324.6,80.88 325.69,81.22 326.81,81.43 327.95,81.5 435.04,81.5 436.18,81.43 437.3,81.22 438.39,80.88 439.43,80.41 440.41,79.82 441.3,79.12 442.11,78.31 442.81,77.41 443.4,76.44 443.87,75.4 444.21,74.31 444.42,73.19 444.49,72.05 444.49,27.95 444.42,26.81 444.21,25.69 443.87,24.6 443.4,23.56 442.81,22.59 442.11,21.69 441.3,20.88 440.41,20.18 439.43,19.59 438.39,19.12 437.3,18.78 436.18,18.57 435.04,18.5 327.95,18.5 326.81,18.57 325.69,18.78 324.6,19.12 323.56,19.59 322.58,20.18 321.69,20.88 320.88,21.69 320.18,22.59 319.59,23.56 319.12,24.6 318.78,25.69 318.57,26.81 318.5,27.95
  Top Layer region: 318.5,172.05 318.57,173.19 318.78,174.31 319.12,175.4 319.59,176.44 320.18,177.41 320.88,178.31 321.69,179.12 322.58,179.82 323.56,180.41 324.6,180.88 325.69,181.22 326.81,181.43 327.95,181.5 435.04,181.5 436.18,181.43 437.3,181.22 438.39,180.88 439.43,180.41 440.41,179.82 441.3,179.12 442.11,178.31 442.81,177.41 443.4,176.44 443.87,175.4 444.21,174.31 444.42,173.19 444.49,172.05 444.49,127.95 444.42,126.81 444.21,125.69 443.87,124.6 443.4,123.56 442.81,122.58 442.11,121.69 441.3,120.88 440.41,120.18 439.43,119.59 438.39,119.12 437.3,118.78 436.18,118.57 435.04,118.5 327.95,118.5 326.81,118.57 325.69,118.78 324.6,119.12 323.56,119.59 322.58,120.18 321.69,120.88 320.88,121.69 320.18,122.58 319.59,123.56 319.12,124.6 318.78,125.69 318.57,126.81 318.5,127.95
  Top Layer region: 318.5,272.05 318.57,273.19 318.78,274.31 319.12,275.4 319.59,276.44 320.18,277.41 320.88,278.31 321.69,279.12 322.58,279.82 323.56,280.41 324.6,280.88 325.69,281.22 326.81,281.43 327.95,281.5 435.04,281.5 436.18,281.43 437.3,281.22 438.39,280.88 439.43,280.41 440.41,279.82 441.3,279.12 442.11,278.31 442.81,277.41 443.4,276.44 443.87,275.4 444.21,274.31 444.42,273.19 444.49,272.05 444.49,227.95 444.42,226.81 444.21,225.69 443.87,224.6 443.4,223.56 442.81,222.58 442.11,221.69 441.3,220.88 440.41,220.18 439.43,219.59 438.39,219.12 437.3,218.78 436.18,218.57 435.04,218.5 327.95,218.5 326.81,218.57 325.69,218.78 324.6,219.12 323.56,219.59 322.58,220.18 321.69,220.88 320.88,221.69 320.18,222.58 319.59,223.56 319.12,224.6 318.78,225.69 318.57,226.81 318.5,227.95
  Top Layer region: 318.5,372.05 318.57,373.19 318.78,374.31 319.12,375.4 319.59,376.44 320.18,377.41 320.88,378.31 321.69,379.12 322.58,379.82 323.56,380.41 324.6,380.88 325.69,381.22 326.81,381.43 327.95,381.5 435.04,381.5 436.18,381.43 437.3,381.22 438.39,380.88 439.43,380.41 440.41,379.82 441.3,379.12 442.11,378.31 442.81,377.41 443.4,376.44 443.87,375.4 444.21,374.31 444.42,373.19 444.49,372.05 444.49,327.95 444.42,326.81 444.21,325.69 443.87,324.6 443.4,323.56 442.81,322.58 442.11,321.69 441.3,320.88 440.41,320.18 439.43,319.59 438.39,319.12 437.3,318.78 436.18,318.57 435.04,318.5 327.95,318.5 326.81,318.57 325.69,318.78 324.6,319.12 323.56,319.59 322.58,320.18 321.69,320.88 320.88,321.69 320.18,322.58 319.59,323.56 319.12,324.6 318.78,325.69 318.57,326.81 318.5,327.95
  Top Layer region: 318.5,472.05 318.57,473.19 318.78,474.31 319.12,475.4 319.59,476.44 320.18,477.41 320.88,478.31 321.69,479.12 322.58,479.82 323.56,480.41 324.6,480.88 325.69,481.22 326.81,481.43 327.95,481.5 435.04,481.5 436.18,481.43 437.3,481.22 438.39,480.88 439.43,480.41 440.41,479.82 441.3,479.12 442.11,478.31 442.81,477.41 443.4,476.44 443.87,475.4 444.21,474.31 444.42,473.19 444.49,472.05 444.49,427.95 444.42,426.81 444.21,425.69 443.87,424.6 443.4,423.56 442.81,422.58 442.11,421.69 441.3,420.88 440.41,420.18 439.43,419.59 438.39,419.12 437.3,418.78 436.18,418.57 435.04,418.5 327.95,418.5 326.81,418.57 325.69,418.78 324.6,419.12 323.56,419.59 322.58,420.18 321.69,420.88 320.88,421.69 320.18,422.58 319.59,423.56 319.12,424.6 318.78,425.69 318.57,426.81 318.5,427.95
  Top Layer region: 318.5,572.05 318.57,573.19 318.78,574.31 319.12,575.4 319.59,576.44 320.18,577.41 320.88,578.31 321.69,579.12 322.58,579.82 323.56,580.41 324.6,580.88 325.69,581.22 326.81,581.43 327.95,581.49 435.04,581.49 436.18,581.43 437.3,581.22 438.39,580.88 439.43,580.41 440.41,579.82 441.3,579.12 442.11,578.31 442.81,577.41 443.4,576.44 443.87,575.4 444.21,574.31 444.42,573.19 444.49,572.05 444.49,527.95 444.42,526.81 444.21,525.69 443.87,524.6 443.4,523.56 442.81,522.58 442.11,521.69 441.3,520.88 440.41,520.18 439.43,519.59 438.39,519.12 437.3,518.78 436.18,518.57 435.04,518.5 327.95,518.5 326.81,518.57 325.69,518.78 324.6,519.12 323.56,519.59 322.58,520.18 321.69,520.88 320.88,521.69 320.18,522.58 319.59,523.56 319.12,524.6 318.78,525.69 318.57,526.81 318.5,527.95
  Top Layer region: 318.5,672.05 318.57,673.18 318.78,674.31 319.12,675.4 319.59,676.44 320.18,677.41 320.88,678.31 321.69,679.12 322.58,679.82 323.56,680.41 324.6,680.88 325.69,681.22 326.81,681.43 327.95,681.49 435.04,681.49 436.18,681.43 437.3,681.22 438.39,680.88 439.43,680.41 440.41,679.82 441.3,679.12 442.11,678.31 442.81,677.41 443.4,676.44 443.87,675.4 444.21,674.31 444.42,673.18 444.49,672.05 444.49,627.95 444.42,626.81 444.21,625.69 443.87,624.6 443.4,623.56 442.81,622.58 442.11,621.69 441.3,620.88 440.41,620.18 439.43,619.59 438.39,619.12 437.3,618.78 436.18,618.57 435.04,618.5 327.95,618.5 326.81,618.57 325.69,618.78 324.6,619.12 323.56,619.59 322.58,620.18 321.69,620.88 320.88,621.69 320.18,622.58 319.59,623.56 319.12,624.6 318.78,625.69 318.57,626.81 318.5,627.95
  Top Layer region: 318.5,772.05 318.57,773.18 318.78,774.31 319.12,775.4 319.59,776.44 320.18,777.41 320.88,778.31 321.69,779.12 322.58,779.82 323.56,780.41 324.6,780.88 325.69,781.22 326.81,781.43 327.95,781.49 435.04,781.49 436.18,781.43 437.3,781.22 438.39,780.88 439.43,780.41 440.41,779.82 441.3,779.12 442.11,778.31 442.81,777.41 443.4,776.44 443.87,775.4 444.21,774.31 444.42,773.18 444.49,772.05 444.49,727.95 444.42,726.81 444.21,725.69 443.87,724.6 443.4,723.56 442.81,722.58 442.11,721.69 441.3,720.88 440.41,720.18 439.43,719.58 438.39,719.12 437.3,718.78 436.18,718.57 435.04,718.5 327.95,718.5 326.81,718.57 325.69,718.78 324.6,719.12 323.56,719.58 322.58,720.18 321.69,720.88 320.88,721.69 320.18,722.58 319.59,723.56 319.12,724.6 318.78,725.69 318.57,726.81 318.5,727.95
  Top Layer region: 318.5,872.05 318.57,873.18 318.78,874.31 319.12,875.4 319.59,876.44 320.18,877.41 320.88,878.31 321.69,879.12 322.58,879.82 323.56,880.41 324.6,880.88 325.69,881.22 326.81,881.43 327.95,881.49 435.04,881.49 436.18,881.43 437.3,881.22 438.39,880.88 439.43,880.41 440.41,879.82 441.3,879.12 442.11,878.31 442.81,877.41 443.4,876.44 443.87,875.4 444.21,874.31 444.42,873.18 444.49,872.05 444.49,827.95 444.42,826.81 444.21,825.69 443.87,824.6 443.4,823.56 442.81,822.58 442.11,821.69 441.3,820.88 440.41,820.17 439.43,819.58 438.39,819.12 437.3,818.78 436.18,818.57 435.04,818.5 327.95,818.5 326.81,818.57 325.69,818.78 324.6,819.12 323.56,819.58 322.58,820.17 321.69,820.88 320.88,821.69 320.18,822.58 319.59,823.56 319.12,824.6 318.78,825.69 318.57,826.81 318.5,827.95
  Top Layer region: 318.5,972.05 318.57,973.18 318.78,974.31 319.12,975.4 319.59,976.44 320.18,977.41 320.88,978.31 321.69,979.12 322.58,979.82 323.56,980.41 324.6,980.88 325.69,981.22 326.81,981.43 327.95,981.49 435.04,981.49 436.18,981.43 437.3,981.22 438.39,980.88 439.43,980.41 440.41,979.82 441.3,979.12 442.11,978.31 442.81,977.41 443.4,976.44 443.87,975.4 444.21,974.31 444.42,973.18 444.49,972.05 444.49,927.95 444.42,926.81 444.21,925.69 443.87,924.6 443.4,923.56 442.81,922.58 442.11,921.69 441.3,920.88 440.41,920.17 439.43,919.58 438.39,919.12 437.3,918.78 436.18,918.57 435.04,918.5 327.95,918.5 326.81,918.57 325.69,918.78 324.6,919.12 323.56,919.58 322.58,920.17 321.69,920.88 320.88,921.69 320.18,922.58 319.59,923.56 319.12,924.6 318.78,925.69 318.57,926.81 318.5,927.95
  Top Layer region: 77.95,-1035.43 76.81,-1035.36 75.69,-1035.16 74.6,-1034.82 73.56,-1034.35 72.59,-1033.76 71.69,-1033.05 70.88,-1032.25 70.18,-1031.35 69.59,-1030.37 69.12,-1029.33 68.78,-1028.24 68.57,-1027.12 68.5,-1025.98 68.5,-918.9 68.57,-917.76 68.78,-916.63 69.12,-915.55 69.59,-914.5 70.18,-913.53 70.88,-912.63 71.69,-911.82 72.59,-911.12 73.56,-910.53 74.6,-910.06 75.69,-909.72 76.81,-909.52 77.95,-909.45 122.05,-909.45 123.19,-909.52 124.31,-909.72 125.4,-910.06 126.44,-910.53 127.41,-911.12 128.31,-911.82 129.12,-912.63 129.82,-913.53 130.41,-914.5 130.88,-915.55 131.22,-916.63 131.43,-917.76 131.5,-918.9 131.5,-1025.98 131.43,-1027.12 131.22,-1028.24 130.88,-1029.33 130.41,-1030.37 129.82,-1031.35 129.12,-1032.25 128.31,-1033.05 127.41,-1033.76 126.44,-1034.35 125.4,-1034.82 124.31,-1035.16 123.19,-1035.36 122.05,-1035.43
  Top Layer region: -22.05,-1035.43 -23.19,-1035.36 -24.31,-1035.16 -25.4,-1034.82 -26.44,-1034.35 -27.41,-1033.76 -28.31,-1033.05 -29.12,-1032.25 -29.82,-1031.35 -30.41,-1030.37 -30.88,-1029.33 -31.22,-1028.24 -31.43,-1027.12 -31.5,-1025.98 -31.5,-918.9 -31.43,-917.76 -31.22,-916.63 -30.88,-915.55 -30.41,-914.5 -29.82,-913.53 -29.12,-912.63 -28.31,-911.82 -27.41,-911.12 -26.44,-910.53 -25.4,-910.06 -24.31,-909.72 -23.19,-909.52 -22.05,-909.45 22.05,-909.45 23.19,-909.52 24.31,-909.72 25.4,-910.06 26.44,-910.53 27.41,-911.12 28.31,-911.82 29.12,-912.63 29.82,-913.53 30.41,-914.5 30.88,-915.55 31.22,-916.63 31.43,-917.76 31.5,-918.9 31.5,-1025.98 31.43,-1027.12 31.22,-1028.24 30.88,-1029.33 30.41,-1030.37 29.82,-1031.35 29.12,-1032.25 28.31,-1033.05 27.41,-1033.76 26.44,-1034.35 25.4,-1034.82 24.31,-1035.16 23.19,-1035.36 22.05,-1035.43
  Top Layer region: -122.05,-1035.43 -123.19,-1035.36 -124.31,-1035.16 -125.4,-1034.82 -126.44,-1034.35 -127.41,-1033.76 -128.31,-1033.05 -129.12,-1032.25 -129.82,-1031.35 -130.41,-1030.37 -130.88,-1029.33 -131.22,-1028.24 -131.43,-1027.12 -131.5,-1025.98 -131.5,-918.9 -131.43,-917.76 -131.22,-916.63 -130.88,-915.55 -130.41,-914.5 -129.82,-913.53 -129.12,-912.63 -128.31,-911.82 -127.41,-911.12 -126.44,-910.53 -125.4,-910.06 -124.31,-909.72 -123.19,-909.52 -122.05,-909.45 -77.95,-909.45 -76.81,-909.52 -75.69,-909.72 -74.6,-910.06 -73.56,-910.53 -72.59,-911.12 -71.69,-911.82 -70.88,-912.63 -70.18,-913.53 -69.59,-914.5 -69.12,-915.55 -68.78,-916.63 -68.57,-917.76 -68.5,-918.9 -68.5,-1025.98 -68.57,-1027.12 -68.78,-1028.24 -69.12,-1029.33 -69.59,-1030.37 -70.18,-1031.35 -70.88,-1032.25 -71.69,-1033.05 -72.59,-1033.76 -73.56,-1034.35 -74.6,-1034.82 -75.69,-1035.16 -76.81,-1035.36 -77.95,-1035.43
  Top Layer region: 9.84,992.12 80.71,992.12 80.71,921.26 9.84,921.26
  Top Layer region: -80.71,992.12 -9.84,992.12 -9.84,921.26 -80.71,921.26
  Top Layer region: -35.4,850.7 35.46,850.7 35.46,779.84 -35.4,779.84
  Top Layer region: -133.86,724.41 -62.99,724.41 -62.99,653.54 -133.86,653.54
  Top Layer region: -133.86,625.98 -62.99,625.98 -62.99,555.12 -133.86,555.12
  Top Layer region: -133.86,527.56 -62.99,527.56 -62.99,456.69 -133.86,456.69
  silkscreen extent -413,-1004 413,1055
RES-ADJ-TH_3296W [mil]
  round 60 hole 30 paste+0 mask+2: 1(0,100.01) 2(0,0.01) 3(0,-99.99)
  silkscreen extent -108,-190 102,190
SPARKFUN-CAPACITORS_CPOL-RADIAL-100UF-25V [mil]
  rect 65x65 hole 27.6 paste+0 mask+2: 1(50,0)
  round 65 hole 27.6 paste+0 mask+2: 2(-50,0)
  silkscreen extent -128,-128 128,128
SW-TH_4P-L6.0-W6.0-P4.50-LS6.1 [mm]
  round 1.8 hole 1.2 paste+0 mask+0.051: 1(-3.05,2.25) 2(3.05,2.25) 3(-3.05,-2.25) 4(3.05,-2.25)
  silkscreen extent -3,-3 3,3

## Nets (pads, with @x,y where several pads share a name; then routed paths per layer and width w, separated by ;. In a path a pad name is that pad's centre, name@x,y a point inside that pad or via, vN(x,y) a via of type N, cw(c..) or ccw(c..) an arc to the next point about the centre after c; other vN are vias at no path point)
CS: H1.5 R1.2 U1.17 | length 36.7
  Bottom Layer w1: H1.5 61.722,53.975 62.865,55.118 R1.2 62.865,50.927 63.754,50.038 U1.17
GND: H1.3 P1.1 R1.1 R2.1 SW1.3 SW2.3 U1.3 U1.13 U1.18 U1.33 U2.6 | length 167.2
  Bottom Layer w1: H1.3 43.434,59.182 64.135,59.182 65.405,57.912 R1.1 65.659,56.515 65.659,58.547 67.437,60.325 68.072,60.325 ; SW2.3 55.465,45.212 64.554,45.212 SW1.3 72.608,47.462 U1.18 79.756,47.498 83.185,50.927 83.185,60.198 U1.13 ; U2.6 56.871,79.223 63.246,85.598 U1.3 74.295,85.598 77.089,82.804 77.089,64.643 U1.13 ; R2.1 65.532,62.865 68.072,60.325 ; 77.089,72.898 U1.33 90.551,73.025 P1.1 ; 68.072,60.325 72.517,60.325 U1.13
GS: U1.4 U2.5 | length 21.5
  Bottom Layer w1: U2.5 62.537,70.792 67.691,75.946 67.691,81.407 69.215,82.931 72.517,82.931 U1.4
POT_CS: H1.4 R1.3 | length 17.1
  Bottom Layer w1: H1.4 43.561,56.261 50.564,56.261 R1.3
POT_R: H1.2 R2.2 | length 21.5
  Bottom Layer w1: H1.2 62.103,61.595 62.992,62.484 R2.2
RET: H1.1 R2.3 U2.4 | length 52.6
  Bottom Layer w1: U2.4 57.912,88.914 57.912,85.725 54.102,81.915 46.609,81.915 43.307,78.613 H1.1 60.198,64.135 R2.3
S$133: 
S$2894: 
SW1_2: SW1.2
SW1_4: SW1.4
SW2_2: SW2.2
SW2_4: SW2.4
U1_1: U1.1
U1_2: U1.2
U1_5: U1.5
U1_6: U1.6
U1_7: U1.7
U1_8: U1.8
U1_9: U1.9
U1_10: U1.10
U1_11: U1.11
U1_12: U1.12
U1_14: U1.14
U1_15: U1.15
U1_16: U1.16
U1_19: SW1.1 U1.19 | length 7.1
  Bottom Layer w1: SW1.1 66.804,43.69 67.945,44.831 72.517,44.831 U1.19
U1_20: SW2.1 U1.20 | length 20.8
  Bottom Layer w1: SW2.1 56.134,40.513 58.42,40.513 70.739,40.513 U1.20
U1_21: U1.21
U1_22: U1.22
U1_23: U1.23
U1_24: U1.24
U1_25: U1.25
U1_26: U1.26
U1_27: U1.27
U1_28: U1.28
U1_29: U1.29
U1_30: U1.30
U1_31: P1.3 U1.31 | length 5.1
  Bottom Layer w1: U1.31 90.551,67.945 P1.3
U1_32: P1.2 U1.32 | length 5.1
  Bottom Layer w1: U1.32 90.551,70.485 P1.2
U1_34: U1.34
U1_35: U1.35
U1_36: U1.36
U1_37: U1.37
U1_38: C1.2 U1.38 | length 6.5
  Bottom Layer w1: U1.38 94.742,85.598 C1.2
U1_39: U1.39
U1_40: C1.1 U1.40 U2.1 | length 51.2
  Bottom Layer w1: U2.1 50.351,91.753 52.324,93.726 87.376,93.726 U1.40 94.361,90.678 95.377,89.662 C1.1
U1_41: U1.41
U1_42: U1.42
U1_43: U1.43
U1_44: 
U1_45: 
U1_46: 
U1_47: 
U1_48: 
U1_49: 
U2_2: U2.2
U2_3: U2.3
U2_7: U2.7
U2_8: U2.8
U2_9: U2.9
U2_10: U2.10
U2_12: U2.11 U2.12 | length 2.5
  Bottom Layer w1: U2.12 U2.11
pads on no net: U1.

## Polygon pours and split planes (outlines as drawn)
GND on Bottom Layer (solid): 38.735,38.481 38.608,38.608 38.608,95.631 100.33,95.631 100.33,38.481 38.735,38.481

## Silkscreen, mask and mechanical layers (free items; w line width, h text height)
Top Overlay:
  text "DAC" at 51.562,77.978 h2.03
  text "GND" at 97.536,72.271 h1
  text "A27" at 97.536,69.604 h1
  text "A26" at 97.536,67.064 h1
  text "3.3V FC" at 67.826,66.675 h1 r270
  text "5V feedback" at 45.085,63.127 h1
  text "3.3V feedback" at 44.958,60.587 h1
  text "5V CC" at 67.699,58.674 h1 r270
  text "GND" at 45.085,58.047 h1
  text "5V control" at 44.958,55.253 h1
  text "3.3V control" at 44.958,52.84 h1
  text "Raspberry Pi Pico" at 83.566,52.832 h2.03 r90
  text "Perturbation" at 46.355,48.649 h1
  text "Calibration" at 59.817,48.649 h1